# EAGLE board GPIOexpander (EAGLE 9.4.2)
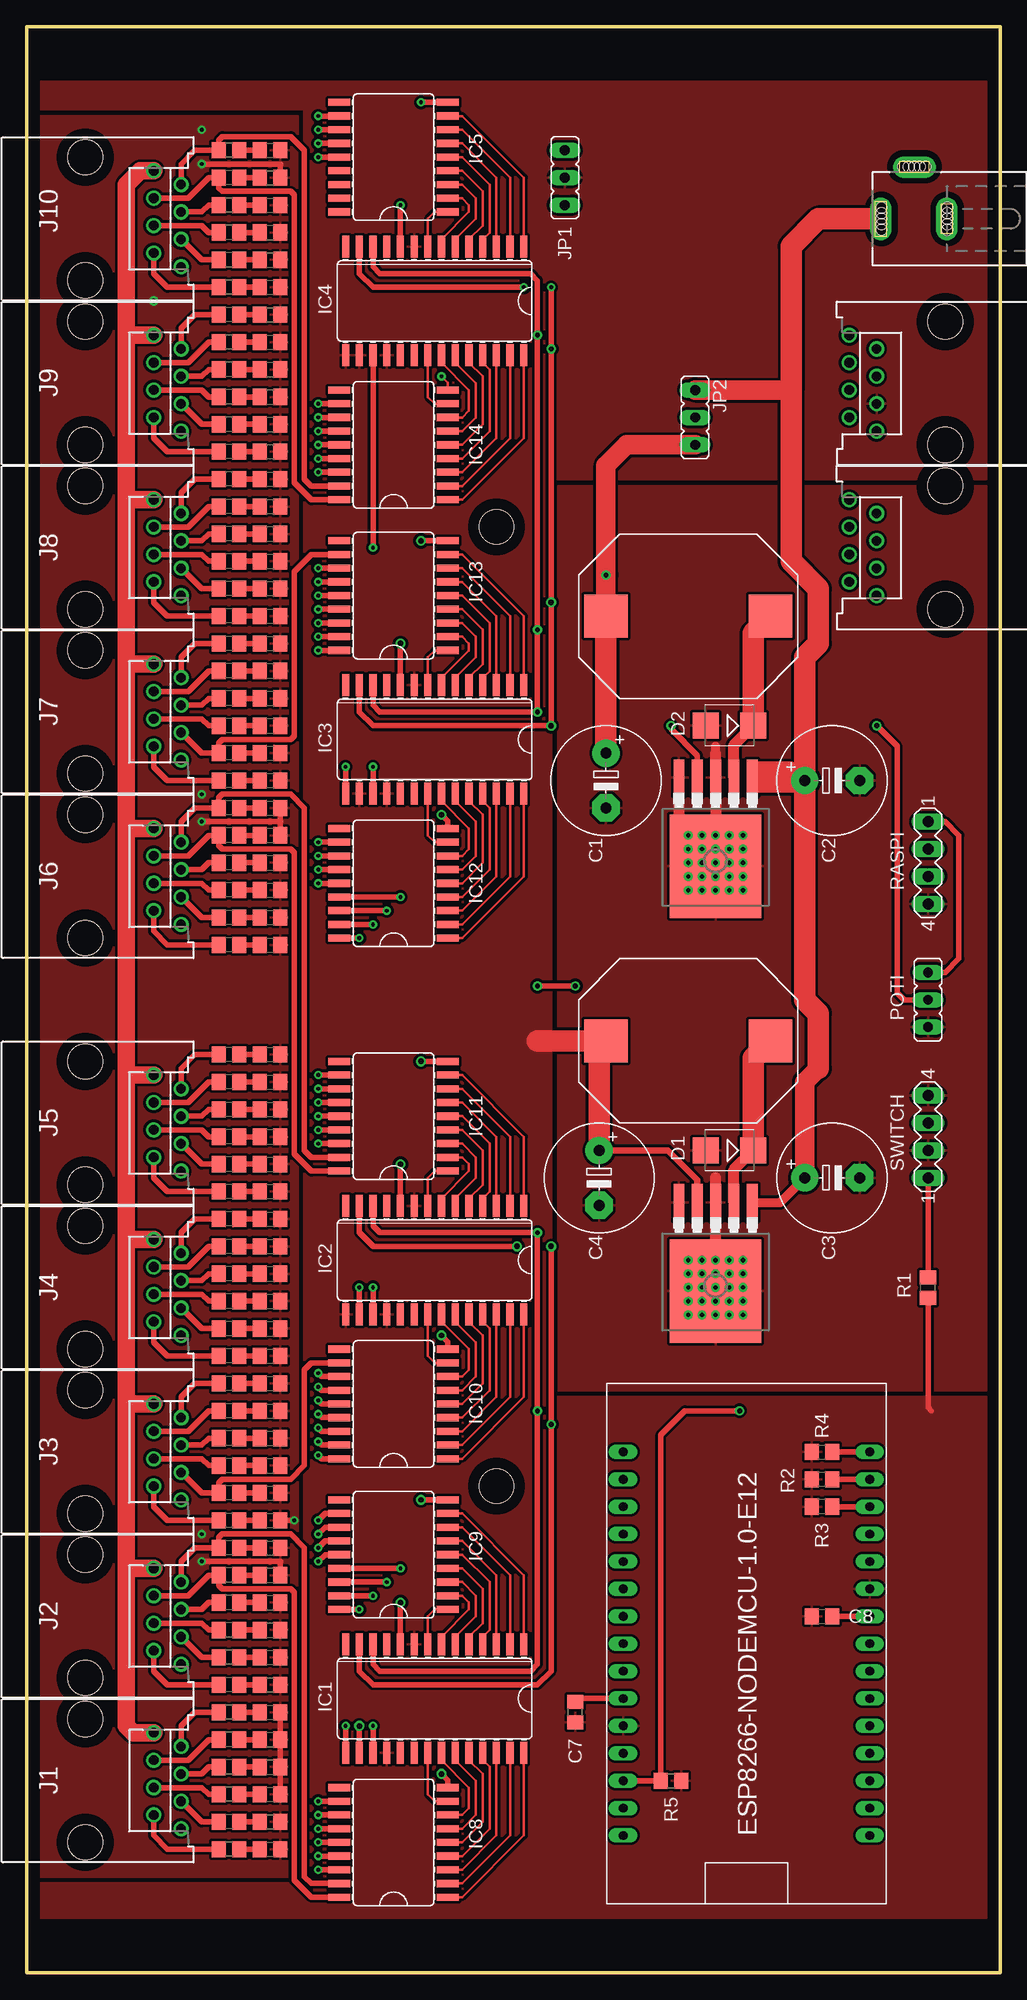
[diagram p0: board, top side]
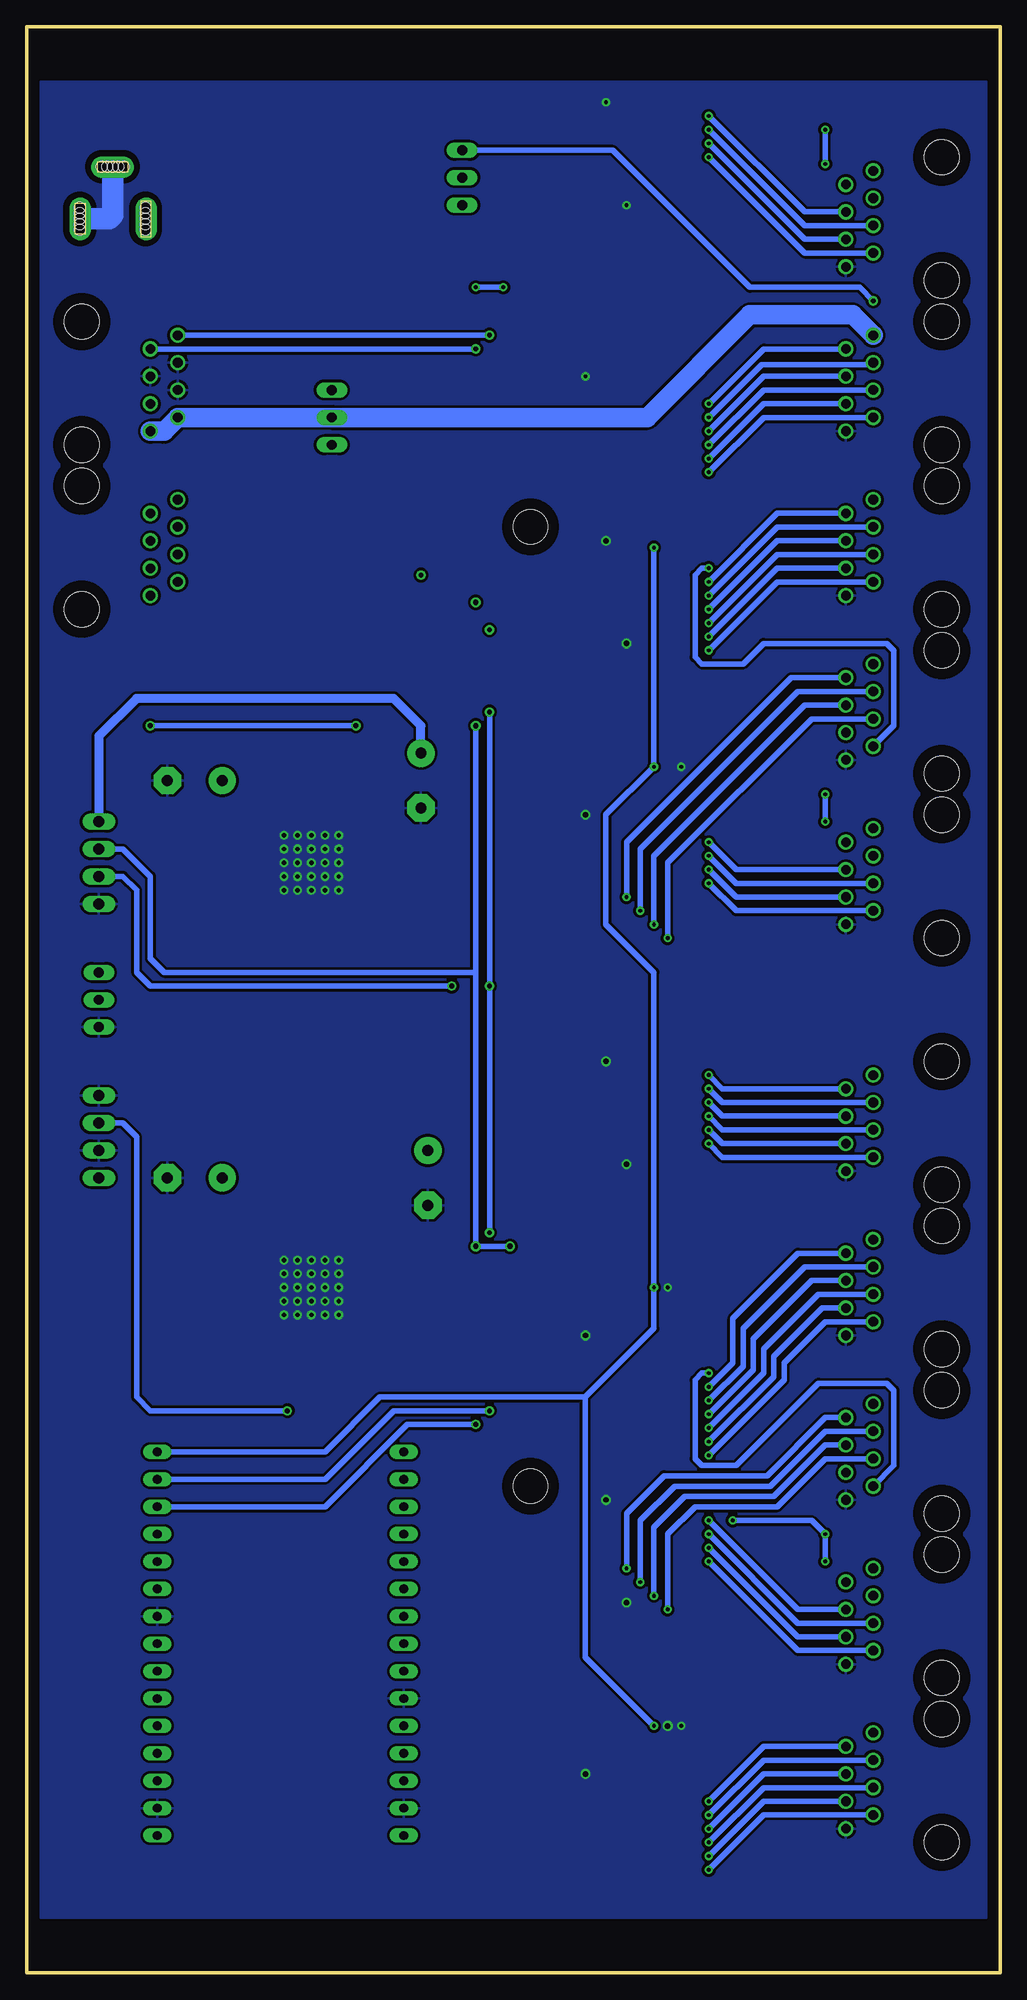
[diagram p1: board, bottom side, seen from below]

Size 90.17 x 180.34 mm. Coordinates in mm from the lower left corner, seen from the top.
Outline: 0,0 90.17,0 90.17,180.34 0,180.34 0,0
Copper layers (1*16): Top 0.035mm / dielectric 1.5mm / Bottom 0.035mm
Design rules "default": minimum track width 6mil, minimum drill 0.35mm, track to track 6mil, track to pad 6mil, pad to pad 6mil, via to via 6mil, smd to smd 6mil, copper to edge 40mil, drill to drill 6mil, minimum pad ring 10mil, minimum via ring 8mil, stop-mask expansion 4mil, vias tented up to drill 0mil, thermal gap 10mil
Holes 3.2 mm at 43.5,133.99 43.5,45.09

## Footprints (pad centres in the part's own frame; a part is rotated, then mirrored left to right if it is on the bottom)
E5-10,5 = drill 1.016 pad 2.54: + -2.54,0 | drill 1.016 pad 2.54 octagon: - 2.54,0
C0805 = smd 1.3 x 1.5: 1 -0.95,0; 2 0.95,0
SMB = smd 2.4 x 2.4: A 2.2,0; C -2.2,0
MCP8266-MODULE = drill 0.813 long: 1 41.91,24.13; 2 39.37,24.13; 3 36.83,24.13; 4 34.29,24.13; 5 31.75,24.13; 6 29.21,24.13; 7 26.67,24.13; 8 24.13,24.13; 9 21.59,24.13; 10 19.05,24.13; 11 16.51,24.13; 12 13.97,24.13; 13 11.43,24.13; 14 8.89,24.13; 15 6.35,24.13; 16 6.35,1.27; 17 8.89,1.27; 18 11.43,1.27; 19 13.97,1.27; 20 16.51,1.27; 21 19.05,1.27; 22 21.59,1.27; 23 24.13,1.27; 24 26.67,1.27; 25 29.21,1.27; 26 31.75,1.27; 27 34.29,1.27; 28 36.83,1.27; 29 39.37,1.27; 30 41.91,1.27
SO28W = smd 0.66 x 2.032: 1 -8.255,-5.029; 2 -6.985,-5.029; 3 -5.715,-5.029; 4 -4.445,-5.029; 5 -3.175,-5.029; 6 -1.905,-5.029; 7 -0.635,-5.029; 8 0.635,-5.029; 9 1.905,-5.029; 10 3.175,-5.029; 11 4.445,-5.029; 12 5.715,-5.029; 13 6.985,-5.029; 14 8.255,-5.029; 15 8.255,5.029; 16 6.985,5.029; 17 5.715,5.029; 18 4.445,5.029; 19 3.175,5.029; 20 1.905,5.029; 21 0.635,5.029; 22 -0.635,5.029; 23 -1.905,5.029; 24 -3.175,5.029; 25 -4.445,5.029; 26 -5.715,5.029; 27 -6.985,5.029; 28 -8.255,5.029
SO18W = smd 0.66 x 2.032: 1 -5.715,-5.029; 2 -4.445,-5.029; 3 -3.175,-5.029; 4 -1.905,-5.029; 5 -0.635,-5.029; 6 0.635,-5.029; 7 1.905,-5.029; 8 3.175,-5.029; 9 4.445,-5.029; 10 4.445,5.029; 11 3.175,5.029; 12 1.905,5.029; 13 0.635,5.029; 14 -0.635,5.029; 15 -1.905,5.029; 16 -3.175,5.029; 17 -4.445,5.029; 18 -5.715,5.029
215877-7 = drill 0.889: 1 -4.445,6.35; 2 -3.175,8.89; 3 -1.905,6.35; 4 -0.635,8.89; 5 0.635,6.35; 6 1.905,8.89; 7 3.175,6.35; 8 4.445,8.89 | hole 3.251: -5.715,0; 5.715,0
DCJ0303 = drill 1 pad 2 long: 1 0,3.1; 2 4.8,0; 3 0,-3 | hole 1: 0,3.048; 0.508,3.048; -0.508,3.048; -1.016,3.048; 1.016,3.048; 0,-3.048; 0.508,-3.048; 1.016,-3.048; -0.508,-3.048; -1.016,-3.048; 4.826,0; 4.826,0.508; 4.826,1.016; 4.826,-0.508; 4.826,-1.016
JP2 = drill 0.914 long: 1 -2.54,0; 2 0,0; 3 2.54,0
BIG_COIL = smd 4 x 4: P$1 15.24,0; P$2 0,0
MA04-1 = drill 1.016 long: 1 -3.81,0; 2 -1.27,0; 3 1.27,0; 4 3.81,0
D2PAK = smd 1 x 3.4: 1 -3.4,-7.875; 2 -1.7,-7.875; 3 0,-7.875; 4 1.7,-7.875; 5 3.4,-7.875 | smd 8.5 x 9.6: 6 0,0.325

## Placement (x,y rotation side)
C1  [E5-10,5]  53.66,110.49 270 top
C2  [E5-10,5]  74.61,110.49 0 top
C3  [E5-10,5]  74.61,73.66 0 top
C4  [E5-10,5]  53.02,73.66 270 top
C7  [C0805]  50.8,24.13 90 top
C8  [C0805]  73.66,33.02 0 top
D1  [SMB]  65.09,76.2 180 top
D2  [SMB]  65.09,115.57 180 top
ESP8266-NODEMCU-1.0-E12  ESP8266-NodeMCU-1.0-E12  [MCP8266-MODULE]  79.38,6.35 90 top
IC1  [SO28W]  37.78,25.4 180 top
IC2  [SO28W]  37.78,66.04 180 top
IC3  [SO28W]  37.78,114.3 180 top
IC4  [SO28W]  37.78,154.94 180 top
IC5  ULN2803-DIL18SSOP18  [SO18W]  33.97,168.91 90 top
IC8  ULN2803-DIL18SSOP18  [SO18W]  33.97,12.7 90 top
IC9  ULN2803-DIL18SSOP18  [SO18W]  33.97,39.37 90 top
IC10  ULN2803-DIL18SSOP18  [SO18W]  33.97,53.34 90 top
IC11  ULN2803-DIL18SSOP18  [SO18W]  33.97,80.01 90 top
IC12  ULN2803-DIL18SSOP18  [SO18W]  33.97,101.6 90 top
IC13  ULN2803-DIL18SSOP18  [SO18W]  33.97,128.27 90 top
IC14  ULN2803-DIL18SSOP18  [SO18W]  33.97,142.24 90 top
J1  [215877-7]  5.4,17.78 270 top
J2  [215877-7]  5.4,33.02 270 top
J3  [215877-7]  5.4,48.26 270 top
J4  [215877-7]  5.4,63.5 270 top
J5  [215877-7]  5.4,78.74 270 top
J6  [215877-7]  5.4,101.6 270 top
J7  [215877-7]  5.4,116.84 270 top
J8  [215877-7]  5.4,132.08 270 top
J9  [215877-7]  5.4,147.32 270 top
J10  [215877-7]  5.4,162.56 270 top
J11  [215877-7]  85.09,147.32 90 top
J12  DCJ0202  [DCJ0303]  82.23,162.56 90 top
J13  [215877-7]  85.09,132.08 90 top
JP1  [JP2]  49.85,166.37 270 top
JP2  [JP2]  61.91,144.15 270 top
L1  150µH  [BIG_COIL]  53.66,125.73 0 top
L2  150µH  [BIG_COIL]  53.66,86.36 0 top
POTI  [JP2]  83.5,90.17 90 top
R1  100R  [C0805]  83.5,63.5 90 top
R2  1k  [C0805]  73.66,45.72 180 top
R3  1k  [C0805]  73.66,43.18 180 top
R4  10k  [C0805]  73.66,48.26 0 top
R5  1k  [C0805]  59.69,17.78 0 top
RASPI  [MA04-1]  83.5,102.87 270 top
SWITCH  [MA04-1]  83.5,77.47 90 top
U$1  R  [C0805]  22.54,24.13 0 top
U$2  R  [C0805]  22.54,21.59 0 top
U$3  R  [C0805]  22.54,19.05 0 top
U$4  R  [C0805]  22.54,16.51 0 top
U$5  R  [C0805]  22.54,13.97 0 top
U$6  R  [C0805]  22.54,11.43 0 top
U$7  LED  [C0805]  18.73,24.13 180 top
U$8  LED  [C0805]  18.73,21.59 180 top
U$9  LED  [C0805]  18.73,19.05 180 top
U$10  LED  [C0805]  18.73,16.51 180 top
U$11  LED  [C0805]  18.73,13.97 180 top
U$12  LED  [C0805]  18.73,11.43 180 top
U$13  LED  [C0805]  18.73,168.91 180 top
U$14  R  [C0805]  22.54,168.91 0 top
U$16  LED  [C0805]  18.73,166.37 180 top
U$17  R  [C0805]  22.54,166.37 0 top
U$18  LED  [C0805]  18.73,163.83 180 top
U$19  R  [C0805]  22.54,163.83 0 top
U$20  LED  [C0805]  18.73,161.29 180 top
U$21  R  [C0805]  22.54,161.29 0 top
U$22  LED  [C0805]  18.73,158.75 180 top
U$23  R  [C0805]  22.54,158.75 0 top
U$24  LED  [C0805]  18.73,156.21 180 top
U$25  R  [C0805]  22.54,156.21 0 top
U$26  LM2576  [D2PAK]  63.82,102.87 180 top
U$28  LM2576  [D2PAK]  63.82,63.5 180 top
U$37  LED  [C0805]  18.73,39.37 180 top
U$38  R  [C0805]  22.54,39.37 0 top
U$39  LED  [C0805]  18.73,36.83 180 top
U$40  R  [C0805]  22.54,36.83 0 top
U$41  LED  [C0805]  18.73,34.29 180 top
U$42  R  [C0805]  22.54,34.29 0 top
U$43  LED  [C0805]  18.73,31.75 180 top
U$44  R  [C0805]  22.54,31.75 0 top
U$45  LED  [C0805]  18.73,29.21 180 top
U$46  R  [C0805]  22.54,29.21 0 top
U$47  LED  [C0805]  18.73,26.67 180 top
U$48  R  [C0805]  22.54,26.67 0 top
U$49  LED  [C0805]  18.73,54.61 180 top
U$50  R  [C0805]  22.54,54.61 0 top
U$51  LED  [C0805]  18.73,52.07 180 top
U$52  R  [C0805]  22.54,52.07 0 top
U$53  LED  [C0805]  18.73,49.53 180 top
U$54  R  [C0805]  22.54,49.53 0 top
U$55  LED  [C0805]  18.73,46.99 180 top
U$56  R  [C0805]  22.54,46.99 0 top
U$57  LED  [C0805]  18.73,44.45 180 top
U$58  R  [C0805]  22.54,44.45 0 top
U$59  LED  [C0805]  18.73,41.91 180 top
U$60  R  [C0805]  22.54,41.91 0 top
U$61  LED  [C0805]  18.73,69.85 180 top
U$62  R  [C0805]  22.54,69.85 0 top
U$63  LED  [C0805]  18.73,67.31 180 top
U$64  R  [C0805]  22.54,67.31 0 top
U$65  LED  [C0805]  18.73,64.77 180 top
U$66  R  [C0805]  22.54,64.77 0 top
U$67  LED  [C0805]  18.73,62.23 180 top
U$68  R  [C0805]  22.54,62.23 0 top
U$69  LED  [C0805]  18.73,59.69 180 top
U$70  R  [C0805]  22.54,59.69 0 top
U$71  LED  [C0805]  18.73,57.15 180 top
U$72  R  [C0805]  22.54,57.15 0 top
U$73  LED  [C0805]  18.73,85.09 180 top
U$74  R  [C0805]  22.54,85.09 0 top
U$75  LED  [C0805]  18.73,82.55 180 top
U$76  R  [C0805]  22.54,82.55 0 top
U$77  LED  [C0805]  18.73,80.01 180 top
U$78  R  [C0805]  22.54,80.01 0 top
U$79  LED  [C0805]  18.73,77.47 180 top
U$80  R  [C0805]  22.54,77.47 0 top
U$81  LED  [C0805]  18.73,74.93 180 top
U$82  R  [C0805]  22.54,74.93 0 top
U$83  LED  [C0805]  18.73,72.39 180 top
U$84  R  [C0805]  22.54,72.39 0 top
U$85  LED  [C0805]  18.73,107.95 180 top
U$86  R  [C0805]  22.54,107.95 0 top
U$87  LED  [C0805]  18.73,105.41 180 top
U$88  R  [C0805]  22.54,105.41 0 top
U$89  LED  [C0805]  18.73,102.87 180 top
U$90  R  [C0805]  22.54,102.87 0 top
U$91  LED  [C0805]  18.73,100.33 180 top
U$92  R  [C0805]  22.54,100.33 0 top
U$93  LED  [C0805]  18.73,97.79 180 top
U$94  R  [C0805]  22.54,97.79 0 top
U$95  LED  [C0805]  18.73,95.25 180 top
U$96  R  [C0805]  22.54,95.25 0 top
U$97  LED  [C0805]  18.73,123.19 180 top
U$98  R  [C0805]  22.54,123.19 0 top
U$99  LED  [C0805]  18.73,120.65 180 top
U$100  R  [C0805]  22.54,120.65 0 top
U$101  LED  [C0805]  18.73,118.11 180 top
U$102  R  [C0805]  22.54,118.11 0 top
U$103  LED  [C0805]  18.73,115.57 180 top
U$104  R  [C0805]  22.54,115.57 0 top
U$105  LED  [C0805]  18.73,113.03 180 top
U$106  R  [C0805]  22.54,113.03 0 top
U$107  LED  [C0805]  18.73,110.49 180 top
U$108  R  [C0805]  22.54,110.49 0 top
U$109  LED  [C0805]  18.73,138.43 180 top
U$110  R  [C0805]  22.54,138.43 0 top
U$111  LED  [C0805]  18.73,135.89 180 top
U$112  R  [C0805]  22.54,135.89 0 top
U$113  LED  [C0805]  18.73,133.35 180 top
U$114  R  [C0805]  22.54,133.35 0 top
U$115  LED  [C0805]  18.73,130.81 180 top
U$116  R  [C0805]  22.54,130.81 0 top
U$117  LED  [C0805]  18.73,128.27 180 top
U$118  R  [C0805]  22.54,128.27 0 top
U$119  LED  [C0805]  18.73,125.73 180 top
U$120  R  [C0805]  22.54,125.73 0 top
U$121  LED  [C0805]  18.73,153.67 180 top
U$122  R  [C0805]  22.54,153.67 0 top
U$123  LED  [C0805]  18.73,151.13 180 top
U$124  R  [C0805]  22.54,151.13 0 top
U$125  LED  [C0805]  18.73,148.59 180 top
U$126  R  [C0805]  22.54,148.59 0 top
U$127  LED  [C0805]  18.73,146.05 180 top
U$128  R  [C0805]  22.54,146.05 0 top
U$129  LED  [C0805]  18.73,143.51 180 top
U$130  R  [C0805]  22.54,143.51 0 top
U$131  LED  [C0805]  18.73,140.97 180 top
U$132  R  [C0805]  22.54,140.97 0 top

## Library data of the parts
C1-C4 C7 C8 = rcl; SPICEPREFIX: C
D1 D2 = diode
ESP8266-NODEMCU-1.0-E12 IC2-IC5 IC8-IC14 J12 L1 L2 R1-R5 U$1-U$14 U$16-U$26 U$28 U$37-U$132 = GPIOexpander
IC1 = GPIOexpander; SPICEPREFIX: X
J1-J11 J13 = con-amp
JP1 JP2 POTI = jumper-alex
RASPI SWITCH = con-lstb; OC_FARNELL: unknown; OC_NEWARK: unknown

## Nets
+3V3: C4.+ C7.1 C8.1 ESP8266-NODEMCU-1.0-E12.11 ESP8266-NODEMCU-1.0-E12.25 IC1.9 IC1.18 IC2.9 IC2.15 IC2.18 IC3.9 IC3.16 IC3.18 IC4.9 IC4.15 IC4.16 IC4.18 J11.3 JP1.2 L2.P$2 R1.1 R2.2 R3.2 R4.1 R5.2 U$28.4
+V: J1.1 J2.1 J3.1 J4.1 J5.1 J6.1 J7.1 J8.1 J9.1 J10.1 J11.1 J11.2 JP2.2
A2: ESP8266-NODEMCU-1.0-E12.30 IC1.17 IC2.17 IC3.17 IC4.17 R4.2
GND: C1.- C2.- C3.- C4.- C7.2 C8.2 D1.A D2.A ESP8266-NODEMCU-1.0-E12.10 ESP8266-NODEMCU-1.0-E12.14 ESP8266-NODEMCU-1.0-E12.17 ESP8266-NODEMCU-1.0-E12.24 IC1.10 IC1.15 IC1.16 IC2.10 IC2.16 IC3.10 IC3.15 IC4.10 IC5.9 IC8.9 IC9.9 IC10.9 IC11.9 IC12.9 IC13.9 IC14.9 J1.8 J2.8 J3.8 J4.8 J5.8 J6.8 J7.8 J8.8 J9.8 J10.8 J11.4 J11.5 J11.6 J12.2 J12.3 POTI.1 RASPI.4 SWITCH.2 SWITCH.4 U$26.3 U$26.5 U$26.6 U$28.3 U$28.5 U$28.6
N$1: IC1.21 IC8.8
N$2: IC1.22 IC8.7
N$3: IC1.23 IC8.6
N$4: IC1.24 IC8.5
N$5: IC1.25 IC8.4
N$6: IC1.26 IC8.3
N$7: IC1.27 IC8.2
N$8: IC1.28 IC8.1
N$9: IC4.8 IC5.1
N$10: IC1.1 IC9.8
N$11: IC1.2 IC9.7
N$12: IC1.3 IC9.6
N$13: IC1.4 IC9.5
N$14: IC1.5 IC9.4
N$15: IC1.6 IC9.3
N$16: IC1.7 IC9.2
N$17: IC1.8 IC9.1
N$18: IC4.7 IC5.2
N$19: IC2.21 IC10.8
N$20: IC2.22 IC10.7
N$21: IC2.23 IC10.6
N$22: IC2.24 IC10.5
N$23: IC2.25 IC10.4
N$24: IC2.26 IC10.3
N$25: IC2.27 IC10.2
N$26: IC2.28 IC10.1
N$27: IC4.6 IC5.3
N$28: IC2.1 IC11.8
N$29: IC2.2 IC11.7
N$30: IC2.3 IC11.6
N$31: IC2.4 IC11.5
N$32: IC2.5 IC11.4
N$33: IC2.6 IC11.3
N$34: IC2.7 IC11.2
N$35: IC2.8 IC11.1
N$36: IC9.15 J3.2 U$49.2
N$37: IC3.21 IC12.8
N$38: IC3.22 IC12.7
N$39: IC3.23 IC12.6
N$40: IC3.24 IC12.5
N$41: IC3.25 IC12.4
N$42: IC3.26 IC12.3
N$43: IC3.27 IC12.2
N$44: IC3.28 IC12.1
N$45: IC9.16 J3.3 U$51.2
N$46: IC3.1 IC13.8
N$47: IC3.2 IC13.7
N$48: IC3.3 IC13.6
N$49: IC3.4 IC13.5
N$50: IC3.5 IC13.4
N$51: IC3.6 IC13.3
N$52: IC3.7 IC13.2
N$53: IC3.8 IC13.1
N$54: IC9.17 J3.4 U$53.2
N$55: IC4.21 IC14.8
N$56: IC4.22 IC14.7
N$57: IC4.23 IC14.6
N$58: IC4.24 IC14.5
N$59: IC4.25 IC14.4
N$60: IC4.26 IC14.3
N$61: IC4.27 IC14.2
N$62: IC4.28 IC14.1
N$63: IC8.17 J2.2 U$37.2
N$64: IC4.5 IC5.4
N$65: IC4.4 IC5.5
N$66: IC4.3 IC5.6
N$67: IC4.2 IC5.7
N$68: IC4.1 IC5.8
N$69: IC14.17 J10.2 U$13.2
N$70: JP1.1 U$1.2 U$2.2 U$3.2 U$4.2 U$5.2 U$6.2 U$14.2 U$17.2 U$19.2 U$21.2 U$23.2 U$25.2 U$38.2 U$40.2 U$42.2 U$44.2 U$46.2 U$48.2 U$50.2 U$52.2 U$54.2 U$56.2 U$58.2 U$60.2 U$62.2 U$64.2 U$66.2 U$68.2 U$70.2 U$72.2 U$74.2 U$76.2 U$78.2 U$80.2 U$82.2 U$84.2 U$86.2 U$88.2 U$90.2 U$92.2 U$94.2 U$96.2 U$98.2 U$100.2 U$102.2 U$104.2 U$106.2 U$108.2 U$110.2 U$112.2 U$114.2 U$116.2 U$118.2 U$120.2 U$122.2 U$124.2 U$126.2 U$128.2 U$130.2 U$132.2
N$71: D2.C L1.P$1 U$26.2
N$72: IC8.11 J1.2 U$7.2
N$73: C2.+ C3.+ J12.1 JP2.1 U$26.1 U$28.1
N$74: IC14.18 J10.3 U$16.2
N$75: IC5.11 J10.4 U$18.2
N$76: IC5.12 J10.5 U$20.2
N$77: IC5.13 J10.6 U$22.2
N$78: IC5.14 J10.7 U$24.2
N$79: U$13.1 U$14.1
N$80: U$16.1 U$17.1
N$81: IC8.18 J2.3 U$39.2
N$82: U$18.1 U$19.1
N$83: U$20.1 U$21.1
N$84: U$22.1 U$23.1
N$85: U$24.1 U$25.1
N$86: POTI.2 U$26.4
N$87: D1.C L2.P$1 U$28.2
N$88: ESP8266-NODEMCU-1.0-E12.13 R5.1 SWITCH.3
N$89: R1.2 SWITCH.1
N$90: IC9.12 J2.5 U$43.2
N$99: IC9.11 J2.4 U$41.2
N$128: IC9.18 J3.5 U$55.2
N$215: IC10.11 J3.6 U$57.2
N$217: IC8.12 J1.3 U$8.2
N$218: IC8.13 J1.4 U$9.2
N$223: IC9.13 J2.6 U$45.2
N$224: IC9.14 J2.7 U$47.2
N$225: IC8.14 J1.5 U$10.2
N$226: IC8.15 J1.6 U$11.2
N$228: IC8.16 J1.7 U$12.2
N$229: IC10.12 J3.7 U$59.2
N$230: IC10.13 J4.2 U$61.2
N$232: IC10.14 J4.3 U$63.2
N$233: IC10.15 J4.4 U$65.2
N$234: IC10.16 J4.5 U$67.2
N$235: IC10.17 J4.6 U$69.2
N$238: IC10.18 J4.7 U$71.2
N$239: IC11.14 J5.5 U$79.2
N$240: IC11.15 J5.6 U$81.2
N$241: IC11.16 J5.7 U$83.2
N$242: IC11.11 J5.2 U$73.2
N$243: IC11.12 J5.3 U$75.2
N$244: IC11.13 J5.4 U$77.2
N$245: IC11.17 J6.2 U$85.2
N$246: IC11.18 J6.3 U$87.2
N$247: IC12.11 J6.4 U$89.2
N$248: IC12.12 J6.5 U$91.2
N$249: IC12.13 J6.6 U$93.2
N$250: IC12.14 J6.7 U$95.2
N$251: IC12.15 J7.2 U$97.2
N$252: IC12.16 J7.3 U$99.2
N$253: IC12.17 J7.4 U$101.2
N$254: IC12.18 J7.5 U$103.2
N$255: IC13.11 J7.6 U$105.2
N$256: IC13.12 J7.7 U$107.2
N$257: IC13.13 J8.2 U$109.2
N$258: IC13.14 J8.3 U$111.2
N$259: IC13.15 J8.4 U$113.2
N$260: IC13.16 J8.5 U$115.2
N$261: IC13.17 J8.6 U$117.2
N$262: IC13.18 J8.7 U$119.2
N$263: IC14.11 J9.2 U$121.2
N$264: IC14.12 J9.3 U$123.2
N$265: IC14.13 J9.4 U$125.2
N$266: IC14.14 J9.5 U$127.2
N$267: IC14.15 J9.6 U$129.2
N$268: IC14.16 J9.7 U$131.2
N$329: U$1.1 U$7.1
N$330: U$2.1 U$8.1
N$331: U$3.1 U$9.1
N$332: U$4.1 U$10.1
N$333: U$5.1 U$11.1
N$334: U$6.1 U$12.1
N$347: U$37.1 U$38.1
N$348: U$39.1 U$40.1
N$349: U$41.1 U$42.1
N$350: U$43.1 U$44.1
N$351: U$45.1 U$46.1
N$352: U$47.1 U$48.1
N$353: U$49.1 U$50.1
N$354: U$51.1 U$52.1
N$355: U$53.1 U$54.1
N$356: U$55.1 U$56.1
N$357: U$57.1 U$58.1
N$358: U$59.1 U$60.1
N$359: U$61.1 U$62.1
N$360: U$63.1 U$64.1
N$361: U$65.1 U$66.1
N$362: U$67.1 U$68.1
N$363: U$69.1 U$70.1
N$364: U$71.1 U$72.1
N$365: U$73.1 U$74.1
N$366: U$75.1 U$76.1
N$367: U$77.1 U$78.1
N$368: U$79.1 U$80.1
N$369: U$81.1 U$82.1
N$370: U$83.1 U$84.1
N$371: U$85.1 U$86.1
N$372: U$87.1 U$88.1
N$373: U$89.1 U$90.1
N$374: U$91.1 U$92.1
N$375: U$93.1 U$94.1
N$376: U$95.1 U$96.1
N$377: U$97.1 U$98.1
N$378: U$99.1 U$100.1
N$379: U$101.1 U$102.1
N$380: U$103.1 U$104.1
N$381: U$105.1 U$106.1
N$382: U$107.1 U$108.1
N$383: U$109.1 U$110.1
N$384: U$111.1 U$112.1
N$385: U$113.1 U$114.1
N$386: U$115.1 U$116.1
N$387: U$117.1 U$118.1
N$388: U$119.1 U$120.1
N$389: U$121.1 U$122.1
N$390: U$123.1 U$124.1
N$391: U$125.1 U$126.1
N$392: U$127.1 U$128.1
N$393: U$129.1 U$130.1
N$394: U$131.1 U$132.1
SCK: ESP8266-NODEMCU-1.0-E12.29 IC1.12 IC2.12 IC3.12 IC4.12 J11.8 R2.1 RASPI.3
SDA: ESP8266-NODEMCU-1.0-E12.28 IC1.13 IC2.13 IC3.13 IC4.13 J11.7 R3.1 RASPI.2
VREG: C1.+ JP2.3 L1.P$2 POTI.3 RASPI.1

## Tracks (layer width: path | path; a pad name or v marks a point on that pad's centre or on a via)
+3V3
  Top 0.508: R1.1 83.5,52.39 83.82,52.07
  Top 0.61: U$28.4 62.12,73.45 59.37,76.2 C4.+
  Top 2: 47.31,86.36 L2.P$2 53.02,85.73 C4.+
  pour Top (isolate 0.254): 1.27,5.08 1.27,8.26 25.72,8.26 25.72,172.72 1.27,172.72 1.27,175.26 88.9,175.26 88.9,138.43 48.58,138.43 48.58,53.34 88.9,53.34 88.9,5.08
+V
  Top 1.27: 9.53,67.95 9.21,67.63
  Top 1.6: 9.21,37.47 9.21,52.71 | 9.21,52.71 9.21,67.63 9.21,83.19 | 9.21,83.19 9.21,106.05 | 9.21,106.05 9.21,121.28 | 9.21,121.28 9.21,136.53 | J2.1 9.21,37.47 | J3.1 9.21,52.71 | J4.1 9.53,67.95 | J5.1 9.21,83.19 | J6.1 9.21,106.05 | J7.1 9.21,121.28 | J8.1 9.21,136.53 | J1.1 9.84,22.22 9.21,22.86 9.21,37.47 | J10.1 10.48,167 9.21,165.74 9.21,151.77 | 9.21,136.53 9.21,151.77 | J9.1 9.21,151.77
  Bottom 1.8: J9.1 13.65,153.67 23.18,153.67 32.7,144.15 JP2.2 J11.2 77.47,142.88 J11.1
A2  (via drill 0.35)
  Top 0.508: v32.07,22.86 IC1.17 | IC3.17 v32.07,111.76 | IC2.17 v32.07,63.5 | v32.07,132.08 IC4.17 | R4.2 ESP8266-NODEMCU-1.0-E12.30
  Bottom 0.508: v32.07,22.86 38.42,29.21 38.42,53.34 | v32.07,132.08 v32.07,111.76 36.51,107.31 36.51,97.16 32.07,92.71 v32.07,63.5 32.07,59.69 38.42,53.34 | ESP8266-NODEMCU-1.0-E12.30 62.55,48.26 57.47,53.34 38.42,53.34
GND  (via drill 0.35, 0.4, 0.5)
  Top 0.254: IC14.9 39,147.37 v38.42,147.96
  Top 0.508: IC10.9 39,58.47 v38.42,59.05 | IC11.9 v36.51,84.45 | IC12.9 39,106.73 v38.42,107.31 | IC13.9 v36.51,132.72 | IC2.10 v34.61,74.93 | IC9.9 v36.51,43.82 | IC1.10 v34.61,34.29 | IC8.9 39,17.83 v38.42,18.41 | IC1.16 v30.8,22.86 | IC3.10 v34.61,123.19 | IC4.10 v34.61,163.83 | IC1.15 v29.53,22.86 | IC2.16 v30.8,63.5 | IC3.15 v29.53,111.76 | IC5.9 v36.51,173.35 | C7.2 51.12,25.4 ESP8266-NODEMCU-1.0-E12.10 | C8.2 ESP8266-NODEMCU-1.0-E12.24
  Top 0.813: 63.82,113.03 63.82,113.67
  Top 1.016: U$26.6 U$26.3 63.82,113.03 | U$26.5 60.42,105 v63.82,101.6 | U$28.6 63.82,73.66
  Bottom 2: J12.3 82.55,162.56 82.23,162.88 J12.2
  other vias: 63.82,102.87 62.55,102.87 65.09,102.87 65.09,101.6 62.55,101.6 62.55,104.14 63.82,104.14 65.09,104.14 65.09,100.33 63.82,100.33 62.55,100.33 61.28,100.33 61.28,101.6 61.28,102.87 61.28,104.14 61.28,105.41 62.55,105.41 63.82,105.41 65.09,105.41 66.36,105.41 66.36,104.14 66.36,102.87 66.36,101.6 66.36,100.33 63.82,63.5 61.28,66.04 66.36,66.04 66.36,60.96 61.28,60.96 63.82,60.96 63.82,66.04 66.36,63.5 61.28,63.5 61.28,64.77 61.28,62.23 62.55,60.96 65.09,60.96 66.36,62.23 66.36,64.77 65.09,66.04 62.55,66.04 62.55,64.77 62.55,63.5 62.55,62.23 63.82,62.23 65.09,62.23 65.09,63.5 65.09,64.77 63.82,64.77
  pour Bottom (isolate 0.254): 1.27,5.08 1.27,175.26 88.9,175.26 88.9,5.08
  pour Top (isolate 0.254): 88.9,137.8 49.21,137.8 49.21,53.98 88.9,53.98
N$1
  Top 0.254: IC1.21 37.15,16.51 37.78,15.88 IC8.8
N$2
  Top 0.203: IC1.22 38.42,19.68
  Top 0.254: 38.42,19.68 40.96,17.14 40.96,15.24 40.32,14.61 IC8.7
N$3
  Top 0.203: IC1.23 39.69,19.68
  Top 0.254: 39.69,19.68 41.59,17.78 41.59,14.61 40.32,13.34 IC8.6
N$4
  Top 0.203: IC1.24 40.96,19.68
  Top 0.254: 40.96,19.68 42.23,18.41 42.23,13.97 40.32,12.07 IC8.5
N$5
  Top 0.203: IC1.25 42.23,19.68
  Top 0.254: 42.23,19.68 42.86,19.05 42.86,13.34 40.32,10.79 IC8.4
N$6
  Top 0.254: IC1.26 43.5,12.7 40.32,9.53 IC8.3
N$7
  Top 0.254: IC1.27 44.77,12.7 40.32,8.26 IC8.2
N$8
  Top 0.254: IC1.28 46.04,12.7 40.32,6.98 IC8.1
N$9
  Top 0.254: IC5.1 37.78,163.19 37.15,162.56 IC4.8
N$10
  Top 0.254: IC1.1 46.04,36.83 40.32,42.55 IC9.8
N$11
  Top 0.254: IC1.2 44.77,36.83 40.32,41.28 IC9.7
N$12
  Top 0.254: IC1.3 43.5,36.83 40.32,40.01 IC9.6
N$13
  Top 0.203: IC1.4 42.23,31.11
  Top 0.254: 42.23,31.11 42.86,31.75 42.86,36.2 40.32,38.73 IC9.5
N$14
  Top 0.203: IC1.5 40.96,31.11
  Top 0.254: 40.96,31.11 42.23,32.38 42.23,35.56 40.32,37.47 IC9.4
N$15
  Top 0.203: IC1.6 39.69,31.11
  Top 0.254: 39.69,31.11 41.59,33.02 41.59,34.92 40.32,36.2 IC9.3
N$16
  Top 0.254: IC1.7 38.42,31.11 40.96,33.66 40.96,34.29 40.32,34.92 IC9.2
N$17
  Top 0.254: IC1.8 37.15,33.02 37.78,33.66 IC9.1
N$18
  Top 0.254: IC4.7 38.42,160.66 40.96,163.19 40.96,163.83 40.32,164.47 IC5.2
N$19
  Top 0.254: IC2.21 37.15,57.15 37.78,56.52 IC10.8
N$20
  Top 0.203: IC2.22 38.42,60.33
  Top 0.254: 38.42,60.33 40.96,57.79 40.96,55.88 40.32,55.25 IC10.7
N$21
  Top 0.203: IC2.23 39.69,60.33
  Top 0.254: 39.69,60.33 41.59,58.42 41.59,55.25 40.32,53.98 IC10.6
N$22
  Top 0.203: IC2.24 40.96,60.33
  Top 0.254: 40.96,60.33 42.23,59.05 42.23,54.61 40.32,52.71 IC10.5
N$23
  Top 0.203: IC2.25 42.23,60.33
  Top 0.254: 42.23,60.33 42.86,59.69 42.86,53.98 40.32,51.44 IC10.4
N$24
  Top 0.254: IC2.26 43.5,53.34 40.32,50.16 IC10.3
N$25
  Top 0.254: IC2.27 44.77,53.34 40.32,48.9 IC10.2
N$26
  Top 0.254: IC2.28 46.04,53.34 40.32,47.62 IC10.1
N$27
  Top 0.254: IC4.6 39.69,160.66 41.59,162.56 41.59,164.47 40.32,165.74 IC5.3
N$28
  Top 0.254: IC2.1 46.04,77.47 40.32,83.19 IC11.8
N$29
  Top 0.254: IC2.2 44.77,77.47 40.32,81.92 IC11.7
N$30
  Top 0.254: IC2.3 43.5,77.47 40.32,80.64 IC11.6
N$31
  Top 0.203: IC2.4 42.23,71.75
  Top 0.254: 42.23,71.75 42.86,72.39 42.86,76.84 40.32,79.38 IC11.5
N$32
  Top 0.203: IC2.5 40.96,71.75
  Top 0.254: 40.96,71.75 42.23,73.03 42.23,76.2 40.32,78.11 IC11.4
N$33
  Top 0.203: IC2.6 39.69,71.75
  Top 0.254: 39.69,71.75 41.59,73.66 41.59,75.56 40.32,76.84 IC11.3
N$34
  Top 0.203: IC2.7 38.42,71.75
  Top 0.254: 38.42,71.75 40.96,74.3 40.96,74.93 40.32,75.56 IC11.2
N$35
  Top 0.254: IC2.8 37.15,73.66 37.78,74.3 IC11.1
N$36  (via drill 0.35)
  Top 0.508: J3.2 14.29,53.34 15.56,54.61 U$49.2 | IC9.15 v34.61,37.47
  Bottom 0.508: v34.61,37.47 34.61,42.55 31.11,46.04 21.59,46.04 16.19,51.44 J3.2
N$37
  Top 0.254: IC3.21 37.15,105.41 37.78,104.78 IC12.8
N$38
  Top 0.203: IC3.22 38.42,108.59
  Top 0.254: 38.42,108.59 40.96,106.05 40.96,104.14 40.32,103.5 IC12.7
N$39
  Top 0.203: IC3.23 39.69,108.59
  Top 0.254: 39.69,108.59 41.59,106.68 41.59,103.5 40.32,102.23 IC12.6
N$40
  Top 0.203: IC3.24 40.96,108.59
  Top 0.254: 40.96,108.59 42.23,107.31 42.23,102.87 40.32,100.97 IC12.5
N$41
  Top 0.203: IC3.25 42.23,108.59
  Top 0.254: 42.23,108.59 42.86,107.95 42.86,102.23 40.32,99.7 IC12.4
N$42
  Top 0.254: IC3.26 43.5,101.6 40.32,98.42 IC12.3
N$43
  Top 0.254: IC3.27 44.77,101.6 40.32,97.16 IC12.2
N$44
  Top 0.254: IC3.28 46.04,101.6 40.32,95.89 IC12.1
N$45  (via drill 0.35)
  Top 0.508: U$51.2 16.83,52.07 14.92,50.16 J3.3 | IC9.16 v33.34,36.2
  Bottom 0.508: v33.34,36.2 33.34,41.91 30.16,45.09 21.27,45.09 16.19,50.16 J3.3
N$46
  Top 0.254: IC3.1 46.04,125.73 40.32,131.44 IC13.8
N$47
  Top 0.254: IC3.2 44.77,125.73 40.32,130.17 IC13.7
N$48
  Top 0.254: IC3.3 43.5,125.73 40.32,128.91 IC13.6
N$49
  Top 0.203: IC3.4 42.23,120.02
  Top 0.254: 42.23,120.02 42.86,120.65 42.86,125.09 40.32,127.64 IC13.5
N$50
  Top 0.203: IC3.5 40.96,120.02
  Top 0.254: 40.96,120.02 42.23,121.28 42.23,124.46 40.32,126.37 IC13.4
N$51
  Top 0.203: IC3.6 39.69,120.02
  Top 0.254: 39.69,120.02 41.59,121.92 41.59,123.83 40.32,125.09 IC13.3
N$52
  Top 0.203: IC3.7 38.42,120.02
  Top 0.254: 38.42,120.02 40.96,122.56 40.96,123.19 40.32,123.83 IC13.2
N$53
  Top 0.254: IC3.8 37.15,121.92 37.78,122.56 IC13.1
N$54  (via drill 0.35)
  Top 0.508: U$53.2 16.83,49.53 16.19,48.9 J3.4 | IC9.17 v32.07,34.92
  Bottom 0.508: v32.07,34.92 32.07,41.28 29.21,44.13 20.95,44.13 16.19,48.9 J3.4
N$55
  Top 0.254: IC4.21 37.15,146.05 37.78,145.41 IC14.8
N$56
  Top 0.254: IC4.22 38.42,149.22 40.96,146.69 40.96,144.78 40.32,144.15 IC14.7
N$57
  Top 0.254: IC4.23 39.69,149.22 41.59,147.32 41.59,144.15 40.32,142.88 IC14.6
N$58
  Top 0.254: IC4.24 40.96,149.22 42.23,147.96 42.23,143.51 40.32,141.6 IC14.5
N$59
  Top 0.254: IC4.25 42.23,149.22 42.86,148.59 42.86,142.88 40.32,140.34 IC14.4
N$60
  Top 0.254: IC4.26 43.5,142.24 40.32,139.06 IC14.3
N$61
  Top 0.254: IC4.27 44.77,142.24 40.32,137.8 IC14.2
N$62
  Top 0.254: IC4.28 46.04,142.24 40.32,136.53 IC14.1
N$63
  Top 0.508: J2.2 14.29,38.1 15.56,39.37 U$37.2 17.78,40.33 18.1,40.64 24.45,40.64 25.72,39.37 25.72,8.89 26.35,8.26 IC8.17
N$64
  Top 0.254: IC4.5 40.96,160.66 42.23,161.93 42.23,165.1 40.32,167 IC5.4
N$65
  Top 0.254: IC4.4 42.23,160.66 42.86,161.29 42.86,165.74 40.32,168.28 IC5.5
N$66
  Top 0.254: IC4.3 43.5,166.37 40.32,169.55 IC5.6
N$67
  Top 0.254: IC5.7 40.32,170.81 44.77,166.37 IC4.2
N$68
  Top 0.254: IC4.1 46.04,166.37 40.32,172.09 IC5.8
N$69
  Top 0.508: J10.2 14.29,167.64 15.56,168.91 U$13.2 17.78,169.87 18.1,170.18 24.45,170.18 25.72,168.91 25.72,138.43 26.35,137.8 IC14.17
N$70  (via drill 0.35, 0.45)
  Top 0.508: U$4.2 U$3.2 U$2.2 U$1.2 | U$88.2 23.49,106.68 | 23.49,106.68 23.5,106.68 | U$40.2 23.49,38.1 23.5,38.1 v16.19,38.1 | U$60.2 v24.77,41.91 | U$17.2 23.49,167.64 23.5,167.64 v16.19,167.64 | U$86.2 23.49,106.68 | 23.49,106.68 v16.19,106.68
  Bottom 0.508: v16.19,38.1 v16.19,40.64 17.46,41.91 v24.77,41.91 | v16.19,167.64 v16.19,170.81 | v16.19,106.68 v16.19,109.22 | v11.75,154.94 13.02,156.21 23.18,156.21 35.88,168.91 JP1.1
  pour Top (isolate 0.254): 25.08,8.89 1.27,8.89 1.27,172.09 25.08,172.09
N$71
  Top 1.016: U$26.2 65.52,113.8 D2.C
  Top 2: D2.C 67.29,124.14 68.88,125.73 L1.P$1
N$72  (via drill 0.35)
  Top 0.508: J1.2 14.29,22.86 15.56,24.13 U$7.2 | IC8.11 v26.99,15.88
  Bottom 0.508: v26.99,15.88 21.91,20.95 J1.2
N$73
  Top 0.813: U$28.1 69.79,71.38 C3.+
  Top 1.016: U$26.1 71.82,110.75 C2.+ | C2.+ 71.44,109.86 67.63,109.86 | C2.+ 70.8,111.76 67.31,111.76
  Top 1.8: C3.+ 72.07,82.55 73.34,83.82 | JP2.1 70.8,146.69
  Top 2: 73.34,83.82 73.34,88.9 72.07,90.17 C2.+ 72.07,121.92 73.34,123.19 73.34,128.27 70.8,130.81 70.8,146.69 70.8,160.02 73.34,162.56 J12.1
N$74
  Top 0.508: J10.3 14.92,164.47 16.83,166.37 U$16.2 17.78,165.41 18.1,165.1 24.45,165.1 24.77,164.78 24.77,138.11 26.35,136.53 IC14.18
N$75  (via drill 0.35)
  Top 0.508: U$18.2 16.83,163.83 16.19,163.19 J10.4 | IC5.11 v26.99,172.09
  Bottom 0.508: v26.99,172.09 18.1,163.19 J10.4
N$76  (via drill 0.35)
  Top 0.508: U$20.2 16.83,161.29 16.19,161.93 J10.5 | IC5.12 v26.99,170.81
  Bottom 0.508: v26.99,170.81 18.1,161.93 J10.5
N$77  (via drill 0.35)
  Top 0.508: U$22.2 16.19,158.75 J10.6 | IC5.13 v26.99,169.55
  Bottom 0.508: v26.99,169.55 18.1,160.66 J10.6
N$78  (via drill 0.35)
  Top 0.508: U$24.2 13.02,156.21 11.75,157.48 J10.7 | IC5.14 v26.99,168.28
  Bottom 0.508: v26.99,168.28 18.1,159.38 J10.7
N$79
  Top 0.508: U$13.1 U$14.1
N$80
  Top 0.508: U$16.1 U$17.1
N$81
  Top 0.508: J2.3 14.92,34.92 16.83,36.83 U$39.2 17.78,35.88 18.1,35.56 24.45,35.56 24.77,35.24 24.77,8.57 26.35,6.98 IC8.18
N$82
  Top 0.508: U$18.1 U$19.1
N$83
  Top 0.508: U$20.1 U$21.1
N$84
  Top 0.508: U$22.1 U$23.1
N$85
  Top 0.508: U$24.1 U$25.1
N$86  (via drill 0.45)
  Top 0.508: U$26.4 62.12,112.83 59.69,115.25 v59.69,115.57 | POTI.2 81.28,90.17 80.64,90.81 80.64,113.67 v78.74,115.57
  Bottom 0.508: v78.74,115.57 v59.69,115.57
N$87
  Top 1.016: U$28.2 65.52,74.43 D1.C
  Top 2: D1.C 67.29,84.75 L2.P$1
N$88  (via drill 0.45)
  Top 0.508: ESP8266-NODEMCU-1.0-E12.13 R5.1 58.74,49.85 60.96,52.07 v66.04,52.07
  Bottom 0.508: v66.04,52.07 78.74,52.07 80.01,53.34 80.01,77.47 81.28,78.74 SWITCH.3
N$89
  Top 0.508: R1.2 SWITCH.1
N$90  (via drill 0.35)
  Top 0.508: U$43.2 16.83,31.75 16.19,32.38 J2.5 | IC9.12 27.62,41.28 v26.99,40.64
  Bottom 0.508: v26.99,40.64 18.73,32.38 J2.5
N$99  (via drill 0.35)
  Top 0.508: U$41.2 16.83,34.29 16.19,33.66 J2.4 | IC9.11 27.62,42.55 v26.99,41.91
  Bottom 0.508: v26.99,41.91 18.73,33.66 J2.4
N$128  (via drill 0.35)
  Top 0.508: U$55.2 16.83,46.99 16.19,47.62 J3.5 | IC9.18 v30.8,33.66
  Bottom 0.508: v30.8,33.66 30.8,40.64 28.26,43.18 20.64,43.18 16.19,47.62 J3.5
N$215
  Top 0.508: J3.6 16.19,44.45 U$57.2 17.78,45.41 18.1,45.72 24.45,45.72 25.72,46.99 25.72,55.88 26.35,56.52 IC10.11
N$217  (via drill 0.35)
  Top 0.508: U$8.2 16.83,21.59 14.92,19.68 J1.3 | IC8.12 v26.99,14.61
  Bottom 0.508: v26.99,14.61 21.91,19.68 J1.3
N$218  (via drill 0.35)
  Top 0.508: U$9.2 16.83,19.05 16.19,18.41 J1.4 | IC8.13 v26.99,13.34
  Bottom 0.508: v26.99,13.34 21.91,18.41 J1.4
N$223  (via drill 0.35)
  Top 0.508: U$45.2 16.19,29.21 J2.6 | IC9.13 27.62,40.01 v26.99,39.37
  Bottom 0.508: v26.99,39.37 18.73,31.11 J2.6
N$224  (via drill 0.35)
  Top 0.508: U$47.2 13.02,26.67 11.75,27.94 J2.7 | IC9.14 27.62,38.73 v26.99,38.1
  Bottom 0.508: v26.99,38.1 18.73,29.84 J2.7
N$225  (via drill 0.35)
  Top 0.508: J1.5 16.19,17.14 16.83,16.51 U$10.2 | IC8.14 v26.99,12.07
  Bottom 0.508: v26.99,12.07 21.91,17.14 J1.5
N$226  (via drill 0.35)
  Top 0.508: U$11.2 16.19,13.97 J1.6 | IC8.15 v26.99,10.79
  Bottom 0.508: v26.99,10.79 21.91,15.88 J1.6
N$228  (via drill 0.35)
  Top 0.508: U$12.2 13.02,11.43 11.75,12.7 J1.7 | IC8.16 v26.99,9.53
  Bottom 0.508: v26.99,9.53 21.91,14.61 J1.7
N$229  (via drill 0.35)
  Top 0.508: U$59.2 13.02,41.91 11.75,43.18 J3.7 | IC10.12 27.3,55.25 v26.99,55.56
  Bottom 0.508: v26.99,55.56 27.62,55.56 28.26,54.93 28.26,47.62 27.62,46.99 24.45,46.99 16.83,54.61 10.48,54.61 9.84,53.98 9.84,46.99 J3.7
N$230  (via drill 0.35)
  Top 0.508: J4.2 14.29,68.58 15.56,69.85 U$61.2 | IC10.13 27.3,53.98 v26.99,54.29
  Bottom 0.508: v26.99,54.29 24.77,56.52 24.77,60.64 18.73,66.67 J4.2
N$232  (via drill 0.35)
  Top 0.508: U$63.2 16.83,67.31 14.92,65.41 J4.3 | IC10.14 27.3,52.71 v26.99,53.02
  Bottom 0.508: v26.99,53.02 23.81,56.2 23.81,59.69 18.1,65.41 J4.3
N$233  (via drill 0.35)
  Top 0.508: U$65.2 16.83,64.77 16.19,64.14 J4.4 | IC10.15 27.3,51.44 v26.99,51.75
  Bottom 0.508: v26.99,51.75 22.86,55.88 22.86,58.74 17.46,64.14 J4.4
N$234  (via drill 0.35)
  Top 0.508: U$67.2 16.83,62.23 16.19,62.87 J4.5 | IC10.16 27.3,50.16 v26.99,50.48
  Bottom 0.508: v26.99,50.48 21.91,55.56 21.91,57.79 16.83,62.87 J4.5
N$235  (via drill 0.35)
  Top 0.508: U$69.2 16.19,59.69 J4.6 | IC10.17 27.3,48.9 v26.99,49.21
  Bottom 0.508: v26.99,49.21 20.98,55.22 20.98,57.11 16.47,61.62 14.31,61.62 J4.6
N$238  (via drill 0.35)
  Top 0.508: U$71.2 13.02,57.15 11.75,58.42 J4.7 | IC10.18 27.3,47.62 v26.99,47.94
  Bottom 0.508: v26.99,47.94 20,54.93 20,56.52 16.19,60.33 J4.7
N$239  (via drill 0.35)
  Top 0.508: U$79.2 16.83,77.47 16.19,78.11 J5.5 | IC11.14 v26.99,79.38
  Bottom 0.508: v26.99,79.38 25.72,78.11 J5.5
N$240  (via drill 0.35)
  Top 0.508: U$81.2 16.19,74.93 J5.6 | IC11.15 v26.99,78.11
  Bottom 0.508: v26.99,78.11 25.72,76.84 J5.6
N$241  (via drill 0.35)
  Top 0.508: U$83.2 13.02,72.39 11.75,73.66 J5.7 | IC11.16 v26.99,76.84
  Bottom 0.508: v26.99,76.84 25.72,75.56 J5.7
N$242  (via drill 0.35)
  Top 0.508: J5.2 14.29,83.82 15.56,85.09 U$73.2 | IC11.11 v26.99,83.19
  Bottom 0.508: v26.99,83.19 25.72,81.92 J5.2
N$243  (via drill 0.35)
  Top 0.508: U$75.2 16.83,82.55 14.92,80.64 J5.3 | IC11.12 v26.99,81.92
  Bottom 0.508: v26.99,81.92 25.72,80.64 J5.3
N$244  (via drill 0.35)
  Top 0.508: U$77.2 16.83,80.01 16.19,79.38 J5.4 | IC11.13 v26.99,80.64
  Bottom 0.508: v26.99,80.64 25.72,79.38 J5.4
N$245
  Top 0.508: J6.2 14.29,106.68 15.56,107.95 U$85.2 17.78,108.91 18.1,109.22 24.45,109.22 25.72,107.95 25.72,76.2 26.35,75.56 IC11.17
N$246
  Top 0.508: J6.3 14.92,103.5 16.83,105.41 U$87.2 17.78,104.45 18.1,104.14 24.45,104.14 24.77,103.82 24.77,75.88 26.35,74.3 IC11.18
N$247  (via drill 0.35)
  Top 0.508: U$89.2 16.83,102.87 16.19,102.23 J6.4 | IC12.11 v26.99,104.78
  Bottom 0.508: v26.99,104.78 24.45,102.23 J6.4
N$248  (via drill 0.35)
  Top 0.508: U$91.2 16.83,100.33 16.19,100.97 J6.5 | IC12.12 v26.99,103.5
  Bottom 0.508: v26.99,103.5 24.45,100.97 J6.5
N$249  (via drill 0.35)
  Top 0.508: U$93.2 16.19,97.79 J6.6 | IC12.13 v26.99,102.23
  Bottom 0.508: v26.99,102.23 24.45,99.7 J6.6
N$250  (via drill 0.35)
  Top 0.508: U$95.2 13.02,95.25 11.75,96.52 J6.7 | IC12.14 v26.99,100.97
  Bottom 0.508: v26.99,100.97 24.45,98.42 J6.7
N$251  (via drill 0.35)
  Top 0.508: J7.2 14.29,121.92 15.56,123.19 U$97.2 | IC12.15 v34.61,99.7
  Bottom 0.508: v34.61,99.7 34.61,104.78 19.37,120.02 J7.2
N$252  (via drill 0.35)
  Top 0.508: U$99.2 16.83,120.65 14.92,118.75 J7.3 | IC12.16 v33.34,98.42
  Bottom 0.508: J7.3 18.73,118.75 33.34,104.14 v33.34,98.42
N$253  (via drill 0.35)
  Top 0.508: U$101.2 16.83,118.11 16.19,117.48 J7.4 | IC12.17 v32.07,97.16
  Bottom 0.508: v32.07,97.16 32.07,103.5 18.1,117.48 J7.4
N$254  (via drill 0.35)
  Top 0.508: U$103.2 16.83,115.57 16.19,116.2 J7.5 | IC12.18 v30.8,95.89
  Bottom 0.508: v30.8,95.89 30.8,102.87 17.46,116.2 J7.5
N$255
  Top 0.508: J7.6 16.19,113.03 U$105.2 17.78,113.98 18.1,114.3 24.45,114.3 24.77,114.62 24.77,129.86 26.35,131.44 IC13.11
N$256  (via drill 0.35)
  Top 0.508: U$107.2 13.02,110.49 11.75,111.76 J7.7 | IC13.12 v26.99,130.17
  Bottom 0.508: J7.7 9.84,115.57 9.84,122.56 10.48,123.19 21.91,123.19 23.81,121.28 27.62,121.28 28.26,121.92 28.26,129.54 27.62,130.17 v26.99,130.17
N$257  (via drill 0.35)
  Top 0.508: J8.2 14.29,137.16 15.56,138.43 U$109.2 | IC13.13 v26.99,128.91
  Bottom 0.508: v26.99,128.91 20.64,135.25 J8.2
N$258  (via drill 0.35)
  Top 0.508: U$111.2 16.83,135.89 14.92,133.99 J8.3 | IC13.14 v26.99,127.64
  Bottom 0.508: v26.99,127.64 20.64,133.99 J8.3
N$259  (via drill 0.35)
  Top 0.508: U$113.2 16.83,133.35 16.19,132.72 J8.4 | IC13.15 v26.99,126.37
  Bottom 0.508: v26.99,126.37 20.64,132.72 J8.4
N$260  (via drill 0.35)
  Top 0.508: U$115.2 16.83,130.81 16.19,131.44 J8.5 | IC13.16 v26.99,125.09
  Bottom 0.508: v26.99,125.09 20.64,131.44 J8.5
N$261  (via drill 0.35)
  Top 0.508: U$117.2 16.19,128.27 J8.6 | IC13.17 v26.99,123.83
  Bottom 0.508: v26.99,123.83 20.64,130.17 J8.6
N$262  (via drill 0.35)
  Top 0.508: U$119.2 13.02,125.73 11.75,127 J8.7 | IC13.18 v26.99,122.56
  Bottom 0.508: v26.99,122.56 20.64,128.91 J8.7
N$263  (via drill 0.35)
  Top 0.508: J9.2 14.29,152.4 15.56,153.67 U$121.2 | IC14.11 v26.99,145.41
  Bottom 0.508: v26.99,145.41 26.95,145.41 21.87,150.5 J9.2
N$264  (via drill 0.35)
  Top 0.508: U$123.2 16.83,151.13 14.92,149.22 J9.3 | IC14.12 v26.99,144.15
  Bottom 0.508: v26.99,144.15 22.07,149.06 11.91,149.06 J9.3
N$265  (via drill 0.35)
  Top 0.508: U$125.2 16.83,148.59 16.19,147.96 J9.4 | IC14.13 v26.99,142.88
  Bottom 0.508: v26.99,142.88 21.91,147.96 J9.4
N$266  (via drill 0.35)
  Top 0.508: U$127.2 16.83,146.05 16.19,146.69 J9.5 | IC14.14 v26.99,141.6
  Bottom 0.508: v26.99,141.6 21.91,146.69 J9.5
N$267  (via drill 0.35)
  Top 0.508: U$129.2 16.19,143.51 J9.6 | IC14.15 v26.99,140.34
  Bottom 0.508: J9.6 21.91,145.41 v26.99,140.34
N$268  (via drill 0.35)
  Top 0.508: U$131.2 13.02,140.97 11.75,142.24 J9.7 | IC14.16 v26.99,139.06
  Bottom 0.508: v26.99,139.06 21.91,144.15 J9.7
N$329
  Top 0.508: U$7.1 U$1.1
N$330
  Top 0.508: U$8.1 U$2.1
N$331
  Top 0.508: U$9.1 U$3.1
N$332
  Top 0.508: U$10.1 U$4.1
N$333
  Top 0.508: U$11.1 U$5.1
N$334
  Top 0.508: U$12.1 U$6.1
N$347
  Top 0.508: U$37.1 U$38.1
N$348
  Top 0.508: U$39.1 U$40.1
N$349
  Top 0.508: U$41.1 U$42.1
N$350
  Top 0.508: U$43.1 U$44.1
N$351
  Top 0.508: U$45.1 U$46.1
N$352
  Top 0.508: U$47.1 U$48.1
N$353
  Top 0.508: U$49.1 U$50.1
N$354
  Top 0.508: U$51.1 U$52.1
N$355
  Top 0.508: U$53.1 U$54.1
N$356
  Top 0.508: U$55.1 U$56.1
N$357
  Top 0.508: U$57.1 U$58.1
N$358
  Top 0.508: U$59.1 U$60.1
N$359
  Top 0.508: U$61.1 U$62.1
N$360
  Top 0.508: U$63.1 U$64.1
N$361
  Top 0.508: U$65.1 U$66.1
N$362
  Top 0.508: U$67.1 U$68.1
N$363
  Top 0.508: U$69.1 U$70.1
N$364
  Top 0.508: U$71.1 U$72.1
N$365
  Top 0.508: U$73.1 U$74.1
N$366
  Top 0.508: U$75.1 U$76.1
N$367
  Top 0.508: U$77.1 U$78.1
N$368
  Top 0.508: U$79.1 U$80.1
N$369
  Top 0.508: U$81.1 U$82.1
N$370
  Top 0.508: U$83.1 U$84.1
N$371
  Top 0.508: U$85.1 U$86.1
N$372
  Top 0.508: U$87.1 U$88.1
N$373
  Top 0.508: U$89.1 U$90.1
N$374
  Top 0.508: U$91.1 U$92.1
N$375
  Top 0.508: U$93.1 U$94.1
N$376
  Top 0.508: U$95.1 U$96.1
N$377
  Top 0.508: U$97.1 U$98.1
N$378
  Top 0.508: U$99.1 U$100.1
N$379
  Top 0.508: U$101.1 U$102.1
N$380
  Top 0.508: U$103.1 U$104.1
N$381
  Top 0.508: U$105.1 U$106.1
N$382
  Top 0.508: U$107.1 U$108.1
N$383
  Top 0.508: U$110.1 U$109.1
N$384
  Top 0.508: U$111.1 U$112.1
N$385
  Top 0.508: U$113.1 U$114.1
N$386
  Top 0.508: U$115.1 U$116.1
N$387
  Top 0.508: U$117.1 U$118.1
N$388
  Top 0.508: U$119.1 U$120.1
N$389
  Top 0.508: U$122.1 U$121.1
N$390
  Top 0.508: U$124.1 U$123.1
N$391
  Top 0.508: U$126.1 U$125.1
N$392
  Top 0.508: U$128.1 U$127.1
N$393
  Top 0.508: U$130.1 U$129.1
N$394
  Top 0.508: U$132.1 U$131.1
SCK  (via drill 0.45)
  Top 0.508: IC2.12 32.07,69.22 32.7,68.58 v47.31,68.58 v47.31,52.07 47.31,28.57 46.67,27.94 32.7,27.94 32.07,28.57 IC1.12 | IC3.12 32.07,117.48 32.7,116.84 v47.31,116.84 v47.31,124.46 v47.31,151.77 47.31,156.84 46.67,157.48 32.7,157.48 32.07,158.12 IC4.12 | ESP8266-NODEMCU-1.0-E12.29 R2.1 | v50.8,91.44 v47.31,91.44
  Bottom 0.508: v47.31,52.07 56.2,52.07 62.55,45.72 ESP8266-NODEMCU-1.0-E12.29 | v47.31,68.58 v47.31,91.44 v47.31,116.84 | J11.8 v47.31,151.77 | v50.8,91.44 78.74,91.44 80.01,92.71 80.01,100.33 81.28,101.6 RASPI.3
SDA  (via drill 0.35, 0.45, 0.5)
  Top 0.508: IC2.13 30.8,68.6 32.09,67.31 v45.4,67.31 | IC3.13 30.8,116.84 32.07,115.57 v48.58,115.57 v48.58,127 v48.58,150.5 v48.58,156.21 | IC1.13 30.8,27.94 32.07,26.67 47.31,26.67 48.58,27.94 v48.58,50.8 v48.58,67.31 | IC4.13 30.8,157.48 32.07,156.21 v46.04,156.21 | ESP8266-NODEMCU-1.0-E12.28 R3.1
  Bottom 0.508: v45.4,67.31 v48.58,67.31 48.58,92.71 | v46.04,156.21 v48.58,156.21 | v48.58,50.8 54.93,50.8 62.55,43.18 ESP8266-NODEMCU-1.0-E12.28 | 48.58,92.71 v48.58,115.57 | J11.7 v48.58,150.5 | 48.58,92.71 77.47,92.71 78.74,93.98 78.74,101.6 81.28,104.14 RASPI.2
VREG  (via drill 0.45)
  Top 0.508: POTI.3 85.09,92.71 86.36,93.98 86.36,105.41 85.09,106.68 RASPI.1
  Top 1.8: L1.P$2 v53.66,129.54 53.66,139.7 55.56,141.6 JP2.3
  Top 2: L1.P$2 C1.+
  Bottom 0.813: C1.+ 53.66,115.57 56.2,118.11 80.01,118.11 83.5,114.62 RASPI.1